# Altium PCB Fuel_Gauge.PcbDoc
Units mil, origin at the board's own origin, x right, y up, seen from the top; angles counter-clockwise.
Board outline 1400 x 1100 mil, 4 copper layers (Top Layer, Upper Inner Layer, Lower Inner Layer, Bottom Layer), stack 23.756 mil thick; 31 components, 17 nets, 111 pads, 69 vias.
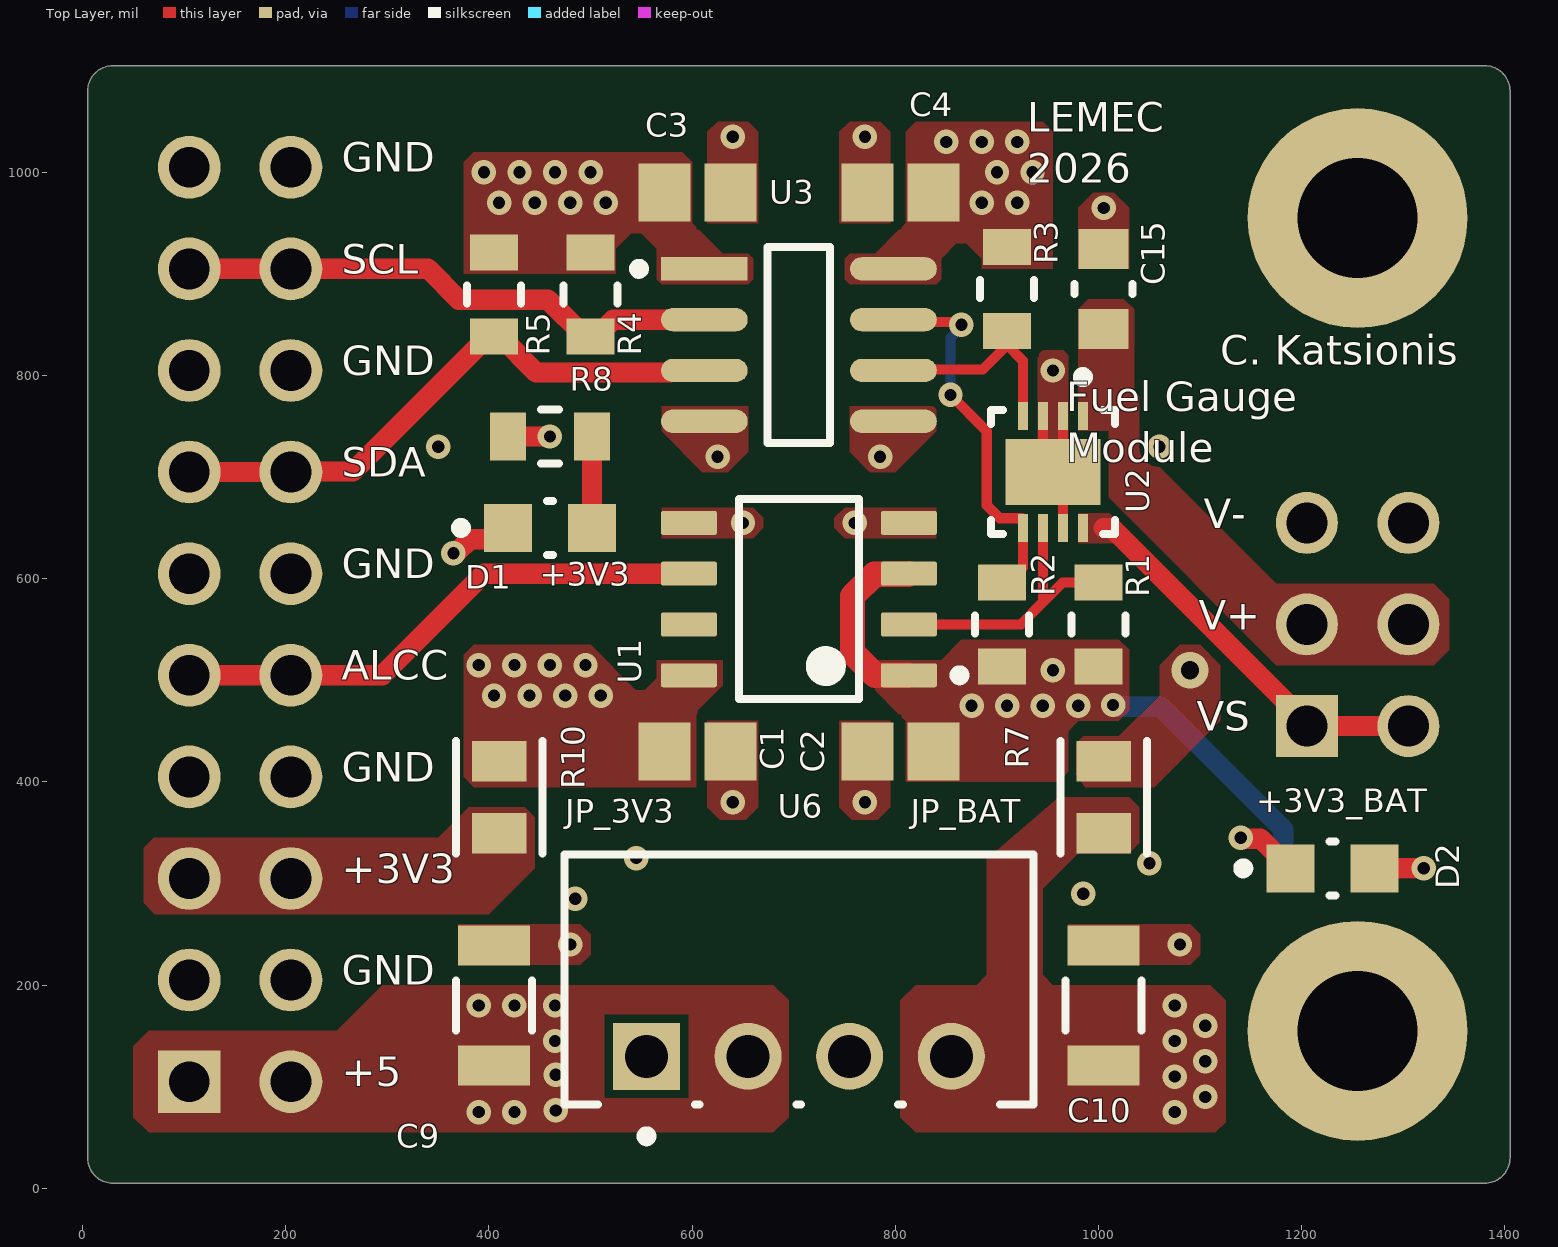
[diagram p0: Top Layer view]
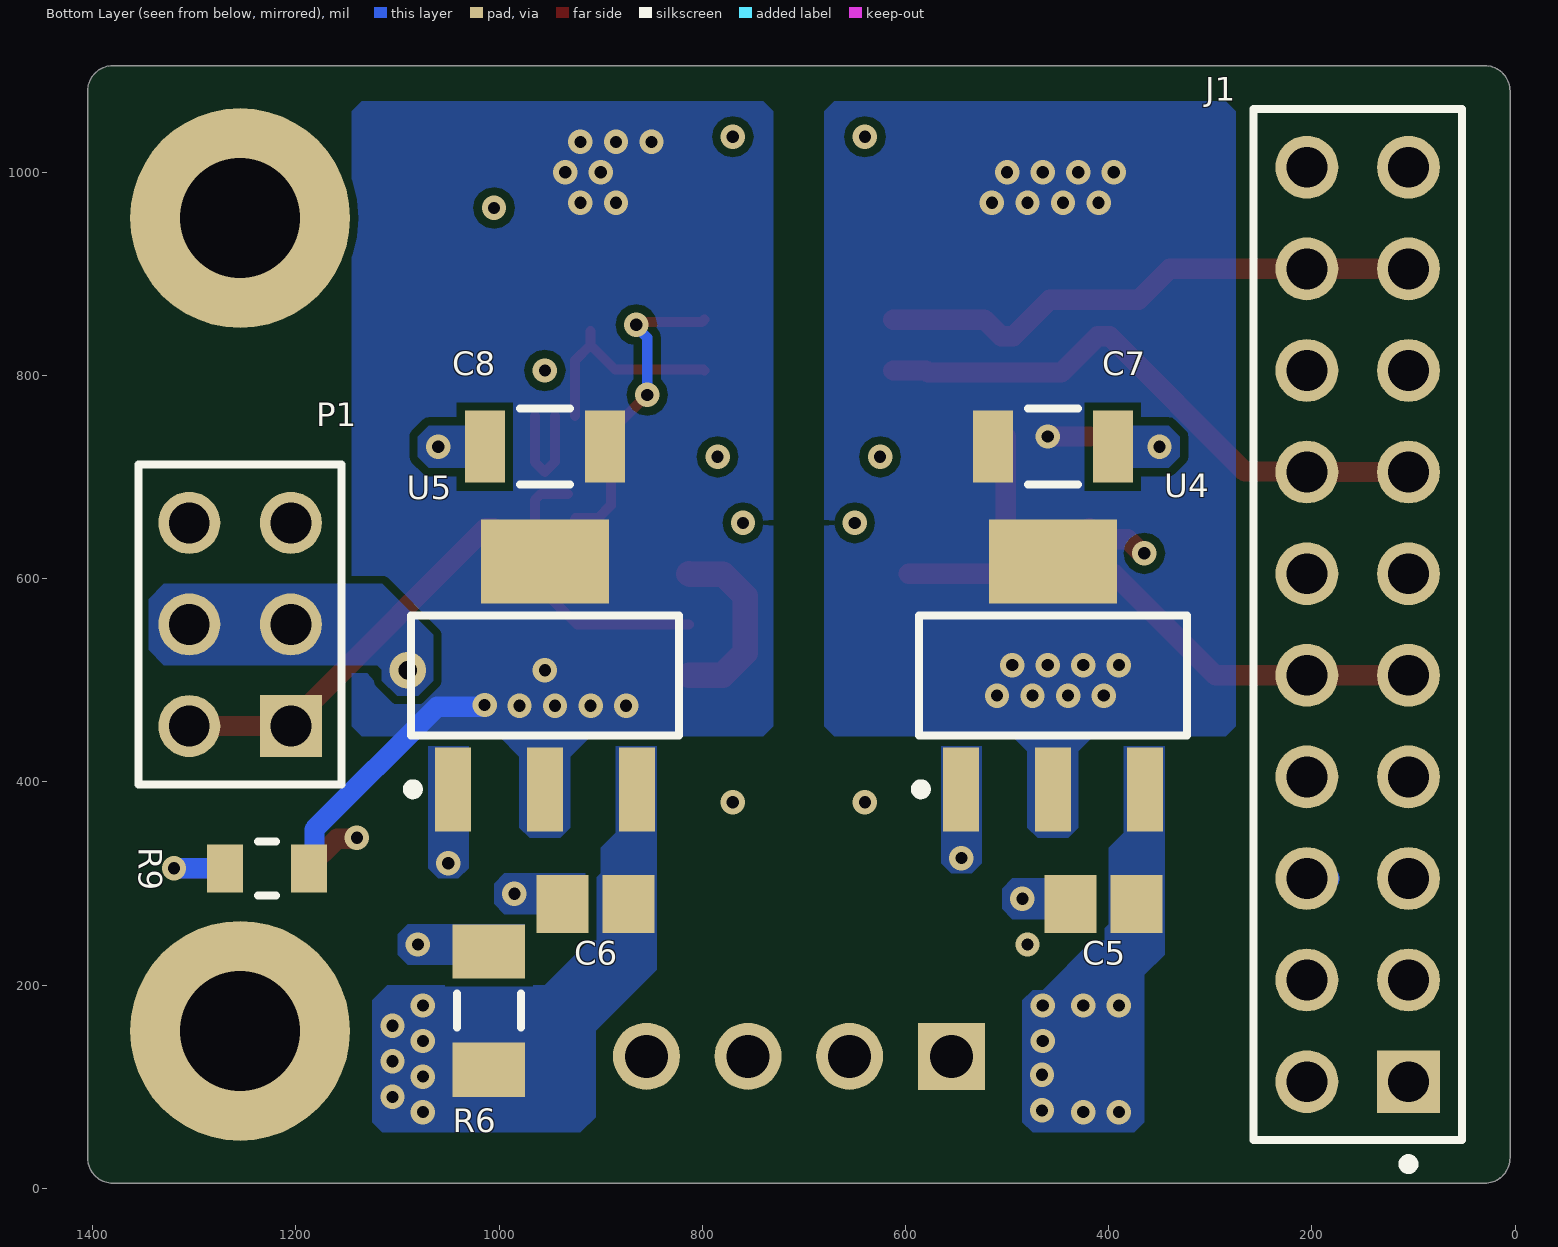
[diagram p1: Bottom Layer view, seen from below]
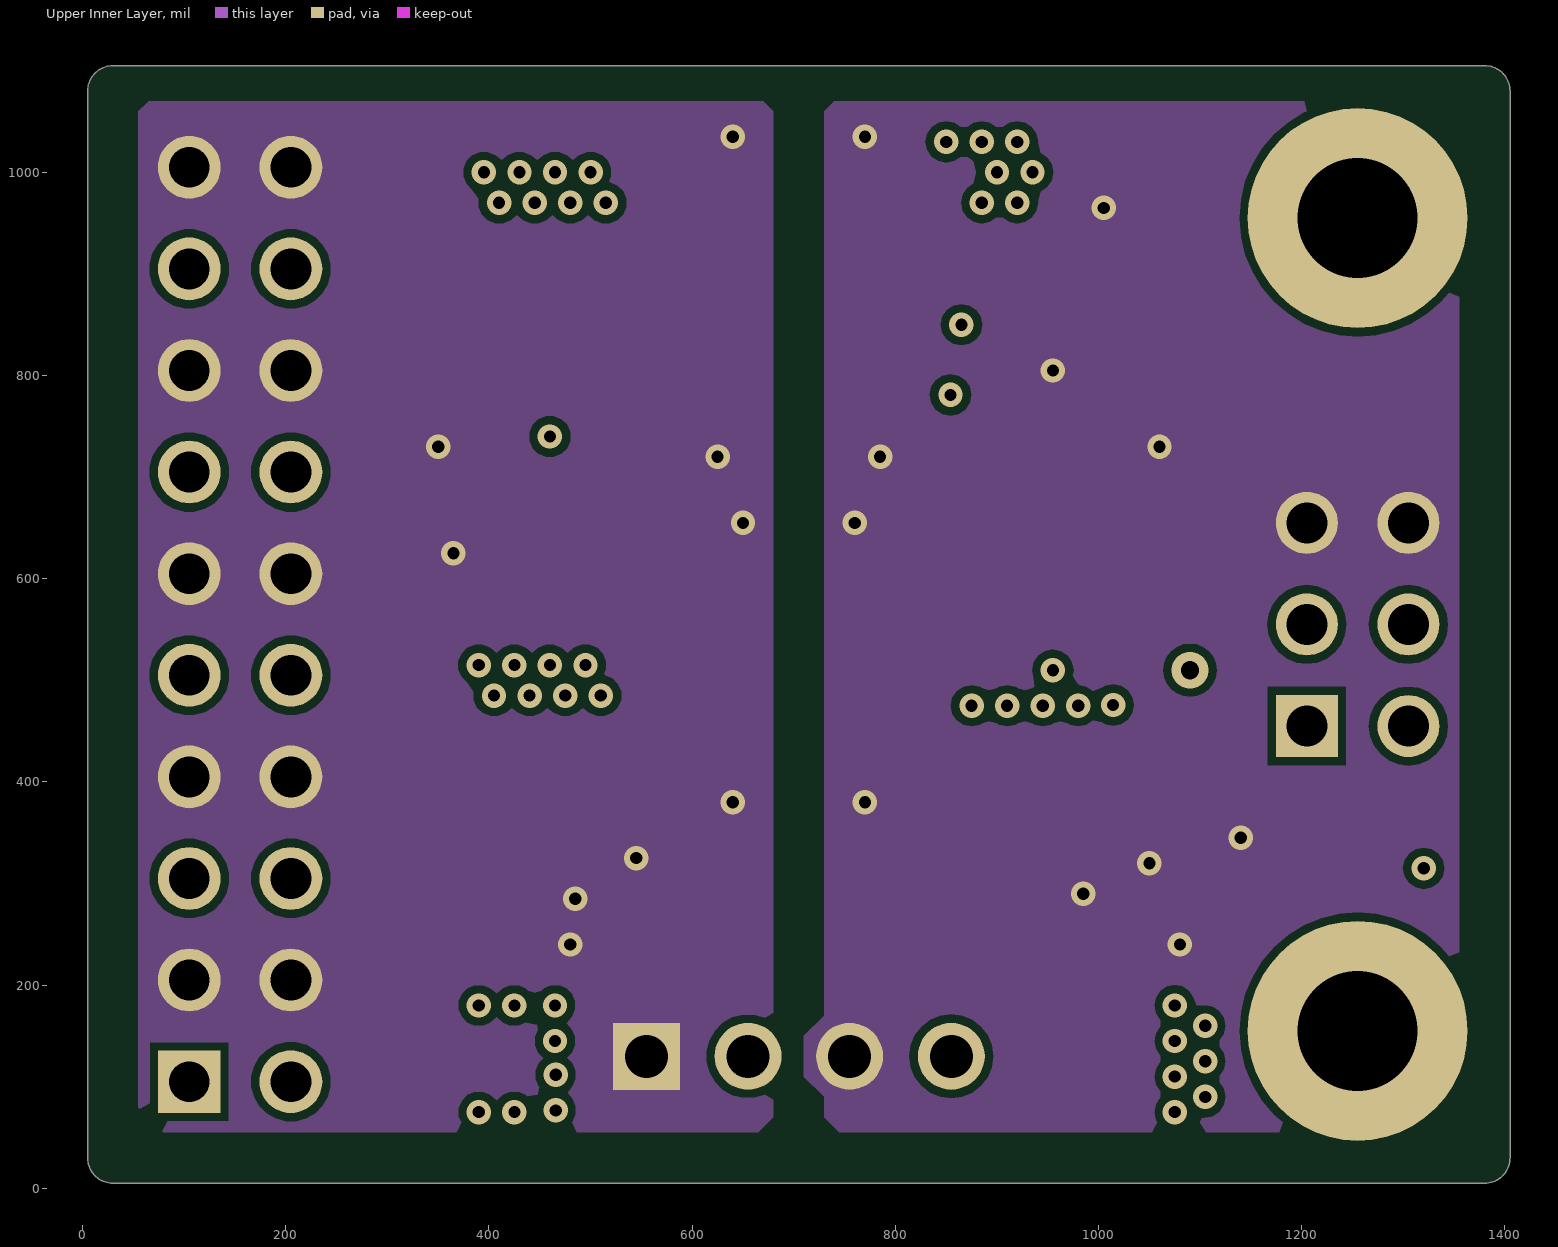
[diagram p2: Upper Inner Layer]
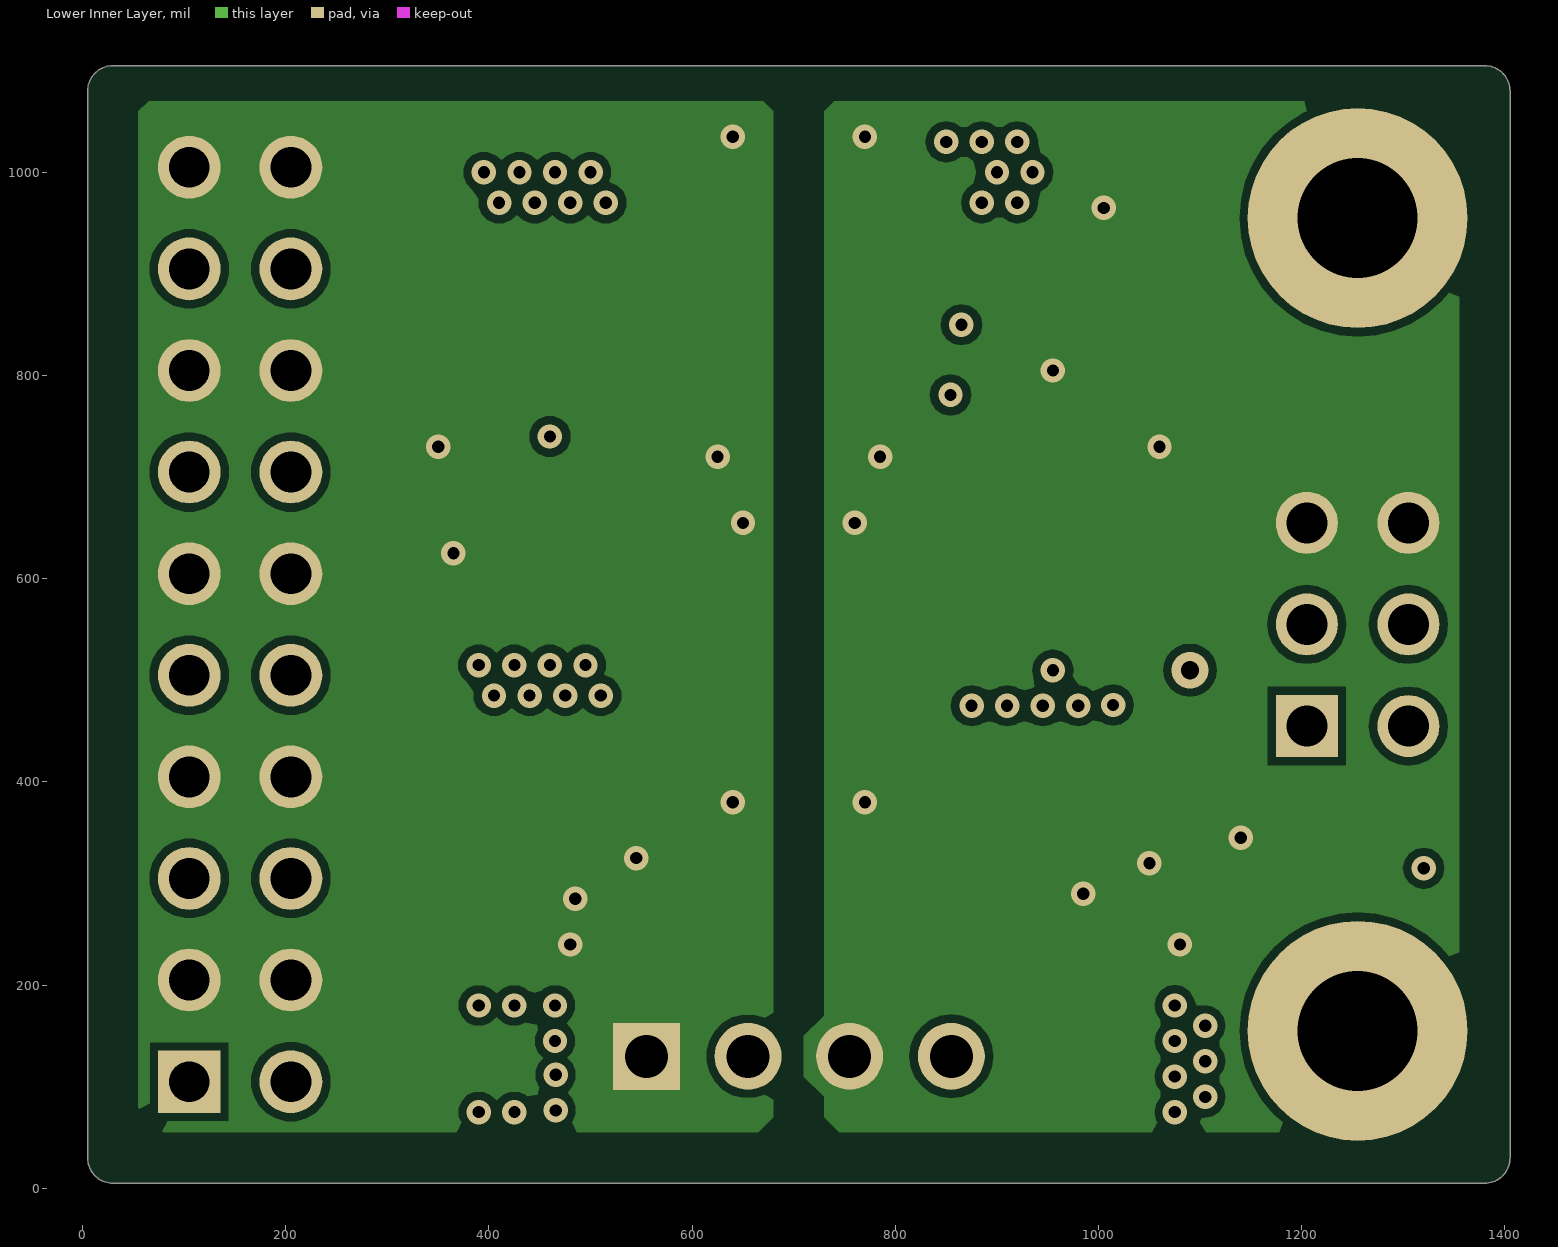
[diagram p3: Lower Inner Layer]
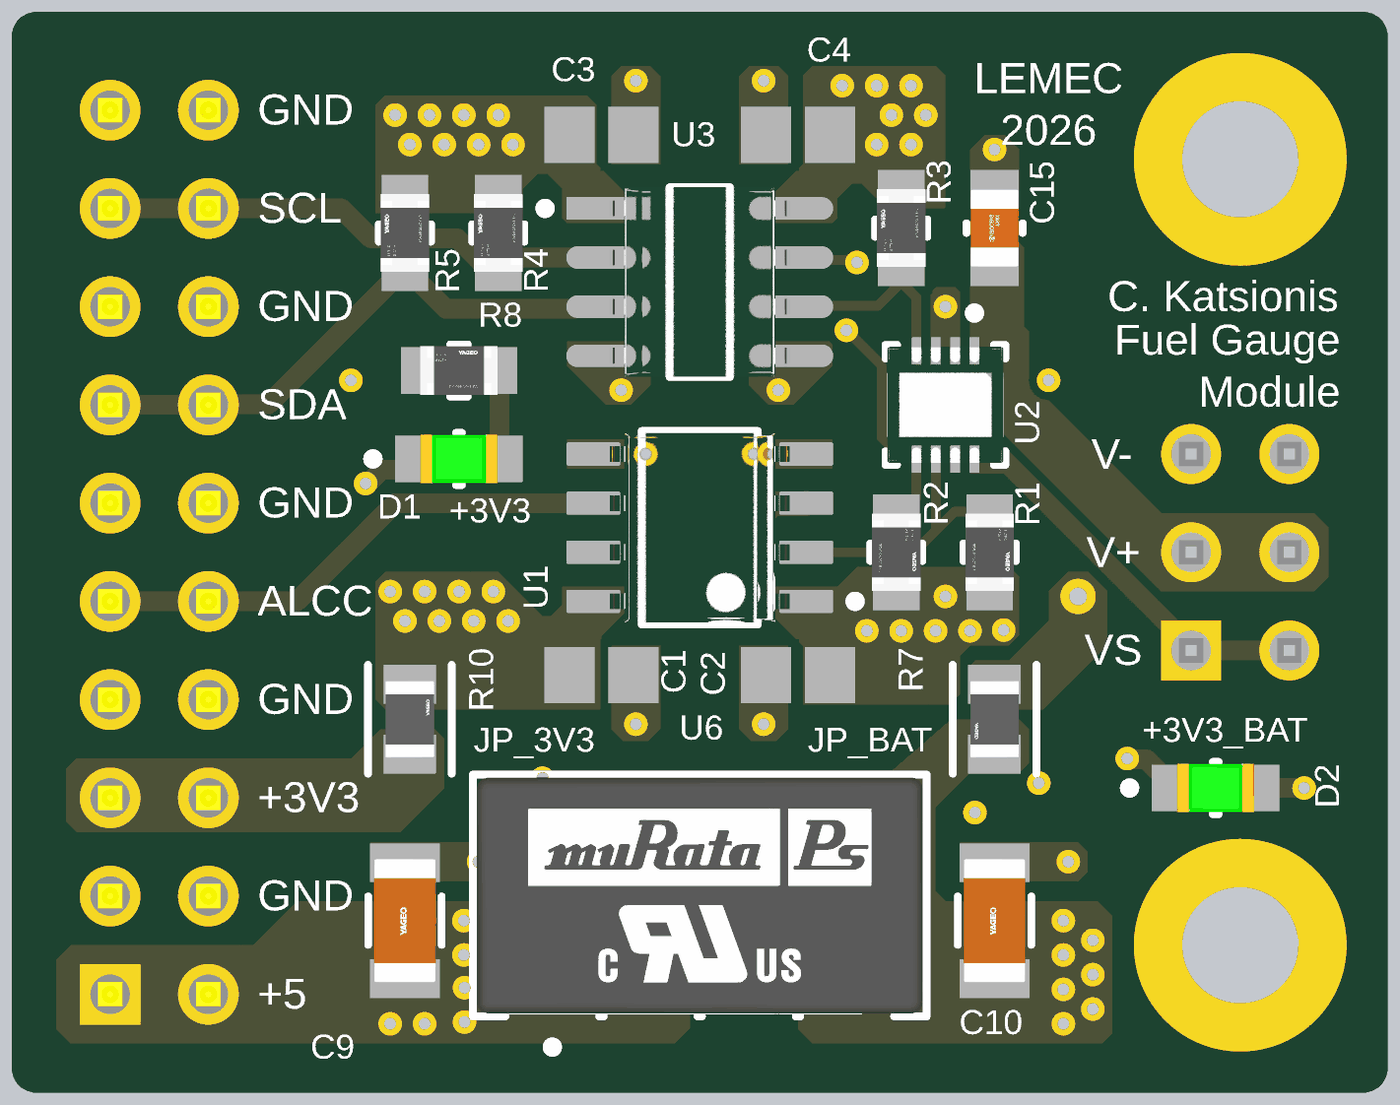
[diagram p4: 3D render of the assembled board from above, using the file's embedded part models]
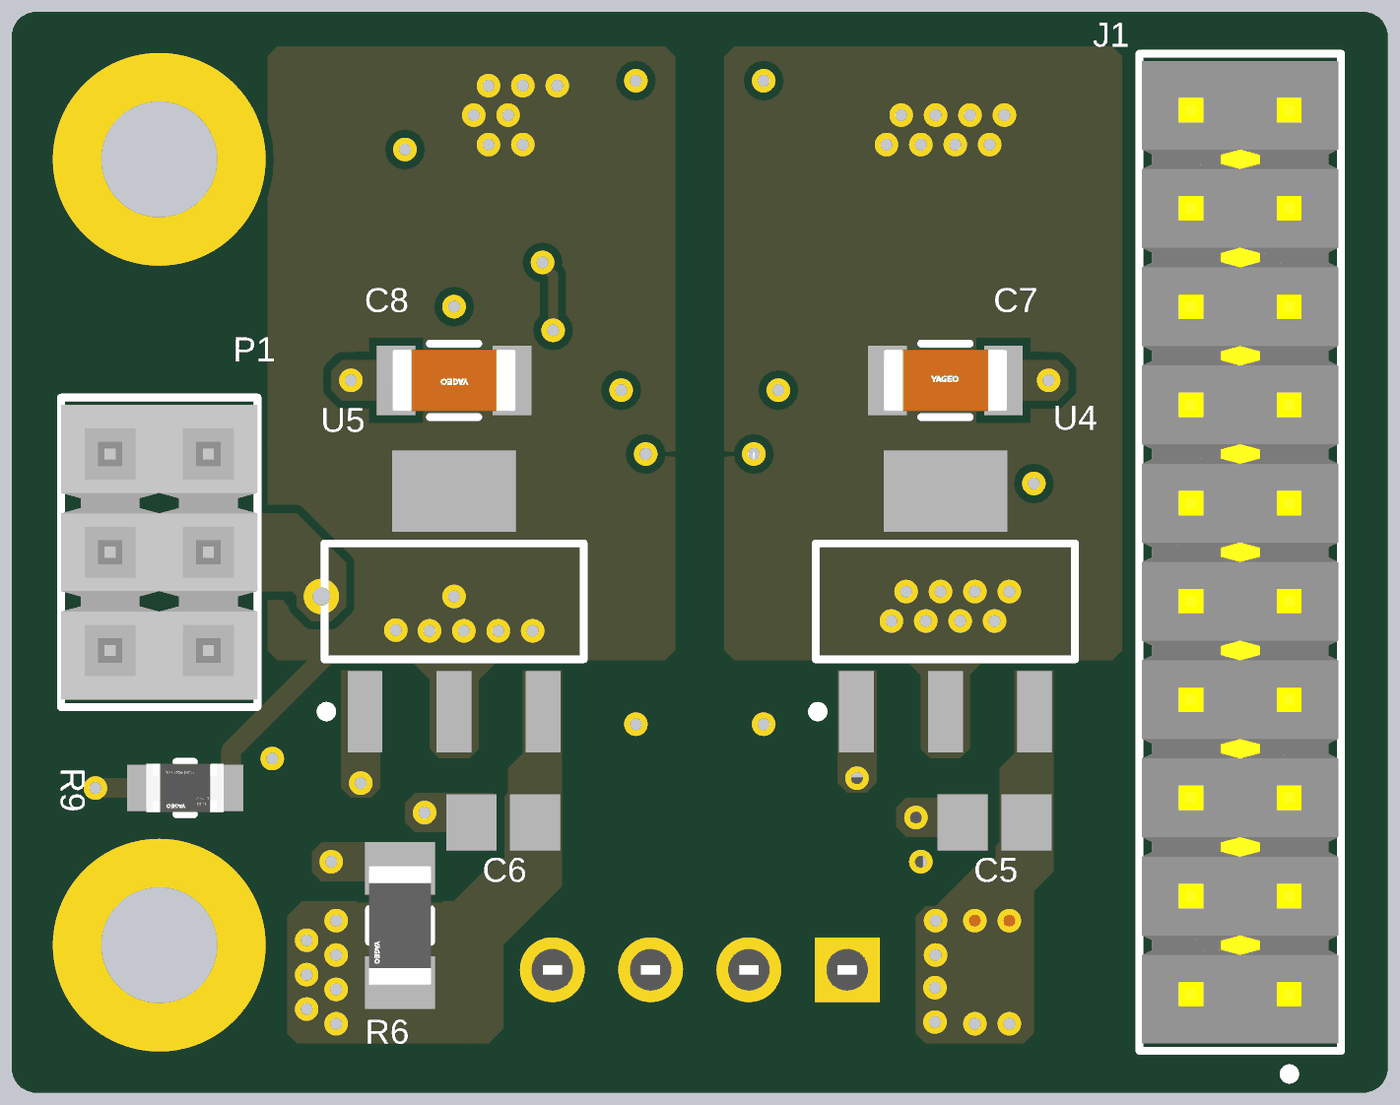
[diagram p5: 3D render of the assembled board from below, using the file's embedded part models]

## Layer stack, top to bottom
Top Solder: solder mask 0.4, Solder Resist, Dk 3.5
Top Layer: signal copper 1.4
Dielectric 2: prepreg 2.8, PP-006, Dk 4.1
Upper Inner Layer: signal copper 1.378
Dielectric 1: dielectric 12.6, FR-4, Dk 4.8
Lower Inner Layer: signal copper 1.378
Dielectric 3: prepreg 2.8, PP-006, Dk 4.1
Bottom Layer: signal copper 1.4
Bottom Solder: solder mask 0.4, Solder Resist, Dk 3.5

## Board outline
5,30 5,1080 cw(c30,1080) 30,1105 1380,1105 cw(c1380,1080) 1405,1080 1405,30 cw(c1380,30) 1380,5 30,5 cw(c30,30)

## Design rules (kind name [scope] priority, off if disabled: settings)
Clearance [All] p1: gap=8 ignorepadtopadclearanceinfootprint=FALSE
HoleSize [All] p1: absolutevalues=TRUE maxlimit=120 minlimit=1 maxpercent=80.000 minpercent=20.000
MinimumSolderMaskSliver [All] p1: minsoldermaskwidth=8
PolygonConnect [All] p1: connectstyle=Direct reliefconductorwidth=10 reliefentries=4 polygonreliefangle="90 Angle" airgapwidth=10
RoutingVias [All] p1: holewidth=12 width=24 viastyle="Through Hole" minholewidth=12 minwidth=24 maxholewidth=25 maxwidth=50
SilkToSolderMaskClearance [IsPad] p1: minsilkscreentomaskgap=7 clearancetoexposedcopper=TRUE
SolderMaskExpansion [All] p1: expansion=0 istentingtop=FALSE
SupplyNets "Schematic Supply Nets_2" [InNet('+3V3_EXT')] p1: voltage=0.000
SupplyNets "Schematic Supply Nets_9" [InNet('+3V3_BAT')] p2: voltage=0.000
SupplyNets "Schematic Supply Nets_6" [InNet('PWR_GND')] p3: voltage=0.000
SupplyNets "Schematic Supply Nets_5" [InNet('GND')] p4: voltage=0.000
SupplyNets "Schematic Supply Nets_4" [InNet('+5V')] p5: voltage=0.000
SupplyNets "Schematic Supply Nets_3" [InNet('+3V3')] p6: voltage=0.000
SupplyNets "Schematic Supply Nets_1" [InNet('+BAT_EXT')] p7: voltage=0.000
SupplyNets "Schematic Supply Nets" [InNet('+V_BAT_LDO')] p8: voltage=0.000
Width PowerWidth [InNetClass('Power')] p1: maxlimit=25 minlimit=10 preferedwidth=20 minimp=50.000000 maximp=50.000000 favimp=50.000000
Width [InNetClass('All Nets')] p2: maxlimit=20 minlimit=10 preferedwidth=15 minimp=50.000000 maximp=50.000000 favimp=50.000000
27 further rules are at their usual default settings.

## Classes and differential pairs
net class Power: +3V3 +3V3_BAT +3V3_EXT +5V +BAT_EXT +V_BAT_LDO GND PWR_GND
component class Fuel_Gauge: C1 C2 C3 C4 C5 C6 C7 C8 C9 C10 C15 R1 R2 R3 R4 R5 R6 U1 U2 U3 U4 U5 U6
component class Connectors: D1 D2 J1 P1 R7 R8 R9 R10

## Components (designator, comment, footprint, x,y, rotation, side; value= is the part's Value field where it differs from the comment)
C1 "0.1u" CAPC2013X145X48NL20T23 605,430 r180 top
C2 "0.1u" CAPC2013X145X48NL20T23 805,430 r0 top
C3 "0.1u" CAPC2013X145X48NL20T23 605,980 r180 top
C4 "0.1u" CAPC2013X145X48NL20T23 805,980 r0 top
C5 "0.1u" CAPC2013X145X48NL20T23 405,280 r180 bottom
C6 "0.1u" CAPC2013X145X48NL20T23 905,280 r180 bottom
C7 "10u" FP-CC1206-FD-MFG 455,730 r180 bottom
C8 "10u" FP-CC1206-FD-MFG 955,730 r0 bottom
C9 "10u" FP-CC1206-FD-MFG 405,180 r90 top
C10 "10u" FP-CC1206-FD-MFG 1005,180 r90 top
C15 "08051C105K4T2A" FP-0805-L_2_01_0_2-W_1_25-MFG 1005,885 r90 top
D1 "+3V3" FP-LTST-C170GKT-MFG 460,650 r0 top
D2 "+3V3_ISO" FP-LTST-C170GKT-MFG 1230,315 r0 top
J1 "MCU_CONNECTOR" FP-TSW-110-26-G-D-MFG 155,555 r90 bottom
P1 "BAT_CONNECTOR" SMTC-TSW-103-08-X-D 1205,455 r90 bottom
R1 "4K7" FP-RT0805-MFG 1000,555 r270 top value=4.7KΩ
R2 "4K7" FP-RT0805-MFG 905,555 r270 top value=4.7KΩ
R3 "4K7" FP-RT0805-MFG 910,885 r90 top value=4.7KΩ
R4 "4K7" FP-RT0805-MFG 500,880 r90 top value=4.7KΩ
R5 "4K7" FP-RT0805-MFG 405,880 r90 top value=4.7KΩ
R6 "270R" FP-AF1206-IPC_A 1010,175 r270 bottom
R7 "0R" FP-AF0805-IPC_B 1005,385 r270 top
R8 "220R" FP-RT0805-MFG 460,740 r0 top value=220Ω
R9 "220R" FP-RT0805-MFG 1228.66,315 r0 bottom value=220Ω
R10 "0R" FP-AF0805-IPC_B 410,385 r90 top
U1 "ISO7710FDR" FP-D0008B-MFG 705,580 r180 top
U2 "LTC2944IDD#PBF" FP-DD-8-05-08-1698-MFG 955,705 r270 top
U3 "ISO1541QDRQ1" FP-D0008A-IPC_B 705,830 r0 top
U4 "LD1117S33TR" SOT-223_L 455,505 r90 bottom
U5 "LD1117S33TR" SOT-223_L 955,505 r90 bottom
U6 "NKE0505SC" FP-NKE-SIP-MFG 705,205.59 r0 top

## Footprints (in the part's own frame and the unit in brackets; to place one, negate y for a bottom-side part, rotate by r counter-clockwise, add the part's x,y. Pads: shape width x height; smd on the part's side, far side on the other; paste and mask are expansions set on the pad)
CAPC2013X145X48NL20T23 [mm] "Chip Capacitor, 2-Leads, Body 2.00x1.25mm, IPC Medium Density"
  rect 1.3x1.45 smd: 1(-0.825,0) 2(0.825,0)
  body extent -1.1,-0.72 1.1,0.72, height 1.45
FP-0805-L_2_01_0_2-W_1_25-MFG [mm]
  rect 1x1.25 smd paste+0 mask+0: 1(-1,0) 2(1,0)
  silkscreen extent -0.13,-0.72 0.13,0.72, body extent -1,-0.63 1,0.63, height 1.4
FP-AF0805-IPC_B [mil]
  rect 39.69x53.63 smd paste+0 mask+0: 1(-35.51,0) 2(35.51,0)
  silkscreen extent -55,-43 55,43, body extent -39,-25 39,25, height 24
FP-AF1206-IPC_A [mil]
  rect 53.47x71.34 smd paste+0 mask+0: 1(-58.15,0) 2(58.15,0)
  silkscreen extent -17,-31 17,31, body extent -61,-31 61,31, height 26
FP-CC1206-FD-MFG [mm]
  rect 1x1.8 smd paste+0 mask+0: 1(-1.5,0) 2(1.5,0)
  silkscreen extent -0.63,-0.95 0.63,0.95, body extent -1.6,-0.8 1.6,0.8, height 1.9
FP-D0008A-IPC_B [mil]
  rect 85.4x22.92 smd paste+0 mask+0: 1(-93.06,75)
  rrect100% 85.4x22.92 smd paste+0 mask+0: 2(-93.06,25) 3(-93.06,-25) 4(-93.06,-75) 5(93.06,-75) 6(93.06,-25) 7(93.06,25) 8(93.06,75)
  silkscreen extent -162,-97 31,97, body extent -146,-106 146,106, height 10
FP-D0008B-MFG [mm]
  rrect17% 1.4x0.6 smd paste+0 mask+0: 1(-2.75,1.905) 2(-2.75,0.635) 3(-2.75,-0.635) 4(-2.75,-1.905) 5(2.75,-1.905) 6(2.75,-0.635) 7(2.75,0.635) 8(2.75,1.905)
  silkscreen extent -4.14,-2.5 1.5,2.5, body extent -3.55,-2.75 3.55,2.75, height 0.25
FP-DD-8-05-08-1698-MFG [mm]
  rect 0.7x0.25 smd paste+0 mask+0: 1(-1.4,0.75) 2(-1.4,0.25) 3(-1.4,-0.25) 4(-1.4,-0.75) 5(1.4,-0.75) 6(1.4,-0.25) 7(1.4,0.25) 8(1.4,0.75)
  rect 1.65x2.38 smd paste+0 mask+0: 9(0,0)
  silkscreen extent -2.5,-1.55 1.55,1.55, body extent -1.85,-1.65 1.85,1.65, height 0.25
FP-LTST-C170GKT-MFG [mm]
  rect 1.2x1.2 smd paste+0 mask+0: 1(-1.05,0) 2(1.05,0)
  silkscreen extent -2.35,-0.67 0.08,0.67, body extent -1.75,-0.77 1.75,0.77, height 0.25
FP-NKE-SIP-MFG [mm]
  rect 1.675x1.675 hole 1.075 paste-2539.97 mask+0: 1(-3.81,-1.92)
  round 1.675 hole 1.075 paste-2539.97 mask+0: 2(-1.27,-1.92) 3(1.27,-1.92) 4(3.81,-1.92)
  silkscreen extent -5.86,-4.04 5.86,3.13, body extent -5.96,-3.22 5.96,3.22, height 0.25
FP-RT0805-MFG [mm]
  rect 0.9x1.2 smd paste+0 mask+0: 1(-1.05,0) 2(1.05,0)
  silkscreen extent -0.23,-0.67 0.23,0.67, body extent -1,-0.63 1,0.63, height 0.6
FP-TSW-110-26-G-D-MFG [mm]
  rect 1.57x1.57 hole 1.02 paste-2539.97 mask+0: 1(-11.43,-1.27)
  round 1.57 hole 1.02 paste-2539.97 mask+0: 2(-11.43,1.27) 3(-8.89,-1.27) 4(-8.89,1.27) 5(-6.35,-1.27) 6(-6.35,1.27) 7(-3.81,-1.27) 8(-3.81,1.27) 9(-1.27,-1.27) 10(-1.27,1.27) 11(1.27,-1.27) 12(1.27,1.27) 13(3.81,-1.27) 14(3.81,1.27) 15(6.35,-1.27) 16(6.35,1.27) 17(8.89,-1.27) 18(8.89,1.27) 19(11.43,-1.27) 20(11.43,1.27)
  silkscreen extent -13.61,-2.61 12.89,2.61, body extent -12.7,-2.54 12.7,2.54, height 8.71
SMTC-TSW-103-08-X-D [mm] ".025 SQ Post Terminal Strip Assembly, 2x3 Pins, Vertical, 2.54mm Pitch, Male"
  rect 1.55x1.55 hole 1.02: 1(0,0)
  round 1.55 hole 1.02: 2(0,2.54) 3(2.54,0) 4(2.54,2.54) 5(5.08,0) 6(5.08,2.54)
  silkscreen extent -1.46,-1.27 6.54,3.81, body extent -1.27,-1.27 6.35,3.81, height 8.38
SOT-223_L [mm] "SOT223, 4-Leads, Body 6.5x3.5mm, Pitch 2.3mm, Lead Span 7mm, IPC High Density"
  rect 2.1x0.9 smd: 1(-2.85,2.3) 2(-2.85,0) 3(-2.85,-2.3)
  rect 2.1x3.2 smd: 4(2.85,0)
  silkscreen extent -2.97,-3.35 1.5,3.43, body extent -1.85,-3.35 1.85,3.35, height 1.8

## Part data
C1 C2 C3 C4 C5 C6: library part CMP-2007-01705-1, Manufacturer=Vitramon, Part Number=VJ0805Y104KXAMR
C7 C8 C9 C10: library part CMP-03422-001420-1, "CAP CER 10UF 50V X5R 1206", Capacitance=10uF, Case/Package=1206, Dielectric=X5R, Max Operating Temperature=85°C, Min Operating Temperature=-55°C, Tolerance=10%, Voltage Rating=50V, Halogen Free="Halogen Free", Lead Free="Lead Free", Length=0.126inch, Mount="Surface Mount", Packaging="Tape and Reel", RoHS Compliant=Yes, Thickness=0.075inch, Voltage Rating (DC)=50V, Width=0.063inch
C15: library part CMP-07738-122049624-1, "08051C105K4T2A Cap Ceramic 1uF 100V X7R 10% Pad SMD 0805 125C Automotive T/R", Capacitance=1µF, Case/Package=0805, Dielectric=X7R, Max Operating Temperature=125°C, Min Operating Temperature=-55°C, Tolerance=10%, Voltage Rating=100V, Height=1.4mm, Lifecycle Status=Production, Material=Ceramic, NexarPartId=122049624, RoHS=Compliant, Schedule B=8532240020, Voltage Rating (DC)=100V
D1 D2: library part CMP-1674-00002-6, "LED GREEN CLEAR SMD", Case Code (Imperial)=0805, Case Code (Metric)=2012, Color=Green, Forward Current=30mA, Forward Voltage=2.1V, Lens Color=Colorless, Max Operating Temperature=85°C, Min Operating Temperature=-55°C, Package Quantity=1, Power Dissipation=100mW, Reverse Voltage=5V, Test Current=10mA, Case/Package=0805, Depth=1.25mm, Dominant Wavelength=569nm, Height=1.1mm, Illumination Color=Green, Lead Free="Lead Free", Length=2mm, Lens Style=Diffused, Lens Transparency=Clear, Luminous Intensity=6mcd, Mount="Surface Mount", Number of Elements=1, Number of LEDs=1, Number of Pins=2, Packaging="Tape and Reel", Power Rating=100mW, Radiation Hardening=No, Viewing Angle=130°, Voltage=5V, Wavelength=565nm, Width=1.25mm
J1: library part CMP-02766-000032-1, "CONN HEADER VERT 20POS 2.54MM", Manufacturer=Samtec, Manufacturer Part Number=TSW-110-26-G-D, Temperature="-55°C to +125°C", Temperature Range High=+125°C, Temperature Range Low=-55°C, Automotive=No, Category=Conn, ComponentLink2Description=Datasheet, ComponentLink2URL=http://suddendocs.samtec.com/prints/tsw-xxx-xx-xxx-x-xx-xxx-mkt.pdf, Conn Gender=Male, Conn Orientation=Vertical, Contact Material=Gold,Nickel, Device Class L1=Connectors, Device Class L2="Headers and Wire Housings", Device Class L3=unset, Digikey Description="CONN HEADER VERT 20POS 2.54MM", Footprint Url=http://suddendocs.samtec.com/prints/tsw-xxx-xx-x-x-xx-xxx-footprint.pdf, Height=8.71mm, Lead Free=Yes, Number of Contacts=20, Number of Rows=2, Octopart=https://octopart.com/tsw-110-26-g-d-samtec-274552, Package=TSW-110-26-G-D, Pitch=2.54mm, RoHS=TRUE
P1: library part CMP-1024-00338-1, "0.025\" SQ Post Header, Through-hole, Vertical, -55 to 125 degC, 2.54 mm Pitch, 6-Pin, Male, RoHS", Manufacturer=Samtec, PartNumber=TSW-103-08-G-D, Temperature Range="-55 to 125 degC", ComponentLink1Description="Manufacturer URL", ComponentLink1URL=http://www.samtec.com, ComponentLink2Description=Datasheet, ComponentLink2URL=http://www.samtec.com/documents/webfiles/pdf/TSW_TH.PDF, ComponentLink3Description="Package Specification", ComponentLink3URL=http://www.samtec.com/documents/webfiles/cpdf/TSW-XXX-XX-XXX-X-XX-XXX-MKT.pdf, DatasheetVersion=F-214, Mounting Technology=Through-hole, Orientation=Vertical, PackageDescription=".025[0.64] SQ. Post Terminal Strip Assembly", PackageReference=TSW-103-08-X-D, PackageVersion="DM, 8/1988", Pitch="2.54 mm", RoHS=True
R1 R2 R3 R4 R5: library part CMP-03412-025396-1, "RT0805 4.7KΩ 0.125W 50 ppm/°C 0.01%", Manufacturer=Yageo, Manufacturer Part Number=RT0805FRE134K7L, Package=RT0805, Power Rating=0.125W, Resistance=4.7KΩ, Temperature="-55°C to +155°C", Temperature Coefficient="50 ppm/°C", Temperature Range High=+155°C, Temperature Range Low=-55°C, Tolerance=0.0001, Voltage Rating=150V, Automotive=No, Category=Res, ComponentLink2Description=Datasheet, ComponentLink2URL=http://www.yageo.com/documents/recent/PYu-RT_1-to-0.01_RoHS_L_9.pdf, Composition="Thin Film", Device Class L1="Passive Components", Device Class L2=Resistors, Device Class L3="Chip SMD Resistors", Footprint Url=http://www.yageo.com/exep/pages/download/literatures/PYu-R_Mount_10.pdf, Height=0.6mm, Ipc Land Pattern Name=RESC200125X50, Lead Free=Yes, Octopart=https://octopart.com/rt0805fre134k7l-yageo-16262042, RoHS=TRUE, Series=RT
R6: library part CMP-03412-047403-1, "Anti-Sulfurated Chip Resistor Automotive Grade 270Ω 5% 0.25W ±100ppm/°C 1206"
R7 R10: library part CMP-03412-047152-1, "Anti-Sulfurated Chip Resistor Automotive Grade 0Ω Jumper 0.125W 0805", Case Code (Imperial)=0805, Case Code (Metric)=2012, Max Operating Temperature=155°C, Max Power Dissipation=125mW, Min Operating Temperature=-55°C, Package Quantity=5000, Resistor Type="Thick Film", Case/Package=0805, Features="Moisture Resistant", Height=0.024inch, Length=0.079inch, Number of Terminations=2, Packaging="Tape and Reel", Resistance=0R, RoHS Compliant=Yes, Series=AF, Termination=SMD/SMT, Weight=0.000194oz, Width=1.25mm
R8 R9: library part CMP-03412-035594-1, "RES SMD 220 OHM 1% 1/8W 0805", Manufacturer=Yageo, Manufacturer Part Number=RT0805FRE07220RL, Package=RT0805, Power Rating=0.125W, Resistance=220Ω, Temperature="-55°C to +155°C", Temperature Coefficient="50 ppm/°C", Temperature Range High=+155°C, Temperature Range Low=-55°C, Tolerance=0.0001, Voltage Rating=150V, Automotive=No, Category=Res, ComponentLink2Description=Datasheet, ComponentLink2URL=http://www.yageo.com/documents/recent/PYu-RT_1-to-0.01_RoHS_L_9.pdf, Composition="Thin Film", Device Class L1="Passive Components", Device Class L2=Resistors, Device Class L3="Chip SMD Resistors", Digikey Description="RES SMD 220 OHM 1% 1/8W 0805", Footprint Url=http://www.yageo.com/exep/pages/download/literatures/PYu-R_Mount_10.pdf, Height=0.6mm, Ipc Land Pattern Name=RESC200125X50, Lead Free=Yes, Mouser Description="Res Thin Film 0805 220 Ohm 1% 1/8W ±50ppm/°C SMD Paper T/R", Octopart=https://octopart.com/rt0805fre07220rl-yageo-39797223, RoHS=TRUE, Series=RT
U1: library part CMP-04872-000020-1, "DGTL ISO 3000VRMS 1CH GP 8SOIC", Max Operating Temperature=125°C, Min Operating Temperature=-55°C, Number of Channels=1
U2: library part CMP-09132-000003-1, "IC BATTERY GAS GAUGE I2C 8DFN", Ambient Temperature Range High=+85°C, Ambient Temperature Range Low=-40°C, Manufacturer="Analog Devices", Max Supply Voltage=60V, Min Supply Voltage=3.6V, Nominal Supply Current=15-850uA, Package=DD-8-05-08-1698, Temperature="-40°C to +85°C", Automotive=No, Category=IC, ComponentLink2Description=Datasheet, ComponentLink2URL=https://www.analog.com/media/en/technical-documentation/data-sheets/2944fa.pdf, Device Class L1="Integrated Circuits (ICs)", Device Class L2="Power Management ICs", Device Class L3="Battery Management", Digikey Description="IC BATTERY GAS GAUGE I2C 8DFN", Height=0.8mm, Ipc Land Pattern Name=DFN300X300X75-8, Lead Free=Yes, Manufacturer Part Number=LTC2944IDD#PBF, Mouser Description="LTC2944 - 60V Battery Gas Gauge with Temperature, Voltage and Current Measurement", Number Of Cells=1, Number Of Outputs=1, Octopart=https://octopart.com/ltc2944idd%23pbf-analog+devices-88318751, RoHS=TRUE, Standoff Height=0mm, Temperature Range High=+85°C, Temperature Range Low=-40°C
U3: library part CMP-04872-000096-1, "AUTO ISO I2C 2500VRMS 2CH 8SOIC", Case/Package=SOIC, Isolated Power=No, Max Operating Temperature=125°C, Min Operating Temperature=-40°C, Working Voltage=560V, Channel Type=Bidirectional, Data Rate=1Mbps, Mount="Surface Mount", Number of Channels=2, Number of Pins=8, Packaging="Cut Tape", Pulse Width Distortion (PWD)=21ns, RoHS Compliant=Yes
U4 U5: library part CMP-0244-00310-1, "Fixed Low Drop Positive Voltage Regulator, 3.3V, 4-Pin SOT-223, Tape and Reel", ComponentLink1Description="Manufacturer URL", ComponentLink1URL=http://www.st.com, ComponentLink2Description=Datasheet, ComponentLink2URL=http://www.st.com/internet/com/TECHNICAL_RESOURCES/TECHNICAL_LITERATURE/DATASHEET/CD00000544.pdf, DatasheetVersion=1/11/2011, PackageDescription="4-Pin SOT-223 Package, 6.5 x 3.5 mm Body, 2.3 mm Pitch, 7 mm Lead Span", PackageReference=SOT-223, PackageVersion=2010
U6: library part CMP-20596-000001-1, "DC DC CONVERTER 12V 1W", Manufacturer="Murata Power Solutions Inc", Manufacturer Part Number=NKE1212SC, Max Power Dissipation=1W, Max Supply Voltage=13.2V, Min Supply Voltage=10.8V, Nominal Supply Current=105mA, Output Current=83mA, Output Voltage=12V, Package=NKE-SIP, Switching Frequency=115kHz, Temperature="-40°C to +85°C", Temperature Range High=+85°C, Temperature Range Low=-40°C, Automotive=No, Category=IC, ComponentLink2Description=Datasheet, ComponentLink2URL=https://power.murata.com/pub/data/power/ncl/kdc_nke.pdf, Device Class L1="Integrated Circuits (ICs)", Device Class L2="Power Management ICs", Device Class L3="Voltage Regulators - Switching", Digikey Description="DC DC CONVERTER 12V 1W", Height=7.71mm, Lead Free=Yes, Mouser Description="Isolated DC/DC Converters 1W SNGL OUT 12-12V Single Output", Number Of Outputs=1, Octopart=https://octopart.com/nke1212sc-murata+power+solutions-49448374, Output Type=Fixed, RoHS=TRUE, Standoff Height=0.4mm, Switching Topology=Boost

## Free pads (board coordinates)
  round 216.54 hole 118.11: 2(1255,155) 2(1255,955)

## Via types
v1: diameter 24, hole 12, Top Layer to Bottom Layer, 68 vias
v2: diameter 36, hole 18, Top Layer to Bottom Layer, 1 vias

## Nets (pads, with @x,y where several pads share a name; then routed paths per layer and width w, separated by ;. In a path a pad name is that pad's centre, name@x,y a point inside that pad or via, vN(x,y) a via of type N, cw(c..) or ccw(c..) an arc to the next point about the centre after c; other vN are vias at no path point)
+3V3: C1.2 C3.2 C7.1 R4.2 R5.2 R8.1 R10.2 U1.8 U3.1 U4.2 U4.4 | length 41.3
  Top Layer w20: R8.1 v1(460,740)
  other v1: 405,485 440,485 475,485 510,485 390,515 425,515 460,515 495,515 410,970 445,970 480,970 515,970 395,1000 430,1000 465,1000 500,1000
+3V3_BAT: C2.2 C4.2 C8.1 R1.2 R2.2 R3.2 R9.1 U1.1 U1.3 U3.8 U5.2 U5.4 | length 443.7
  Top Layer w25: U1.1 780,505 757.85,527.15 757.85,582.85 779.31,604.31 812.58,604.31 U1.3
  Bottom Layer w20: v1(1014.26,475.74) 1015.99,474.01 1060.99,474.01 1181.78,353.22 1181.78,320.54 R9.1
  other v1: 875,475 910,475 945,475 980,475 955,510 885,970 920,970 900,1000 935,1000 850,1030 885,1030 920,1030
+3V3_EXT: J1.5 J1.6 R10.1 | length 29.4
  Bottom Layer w25: J1.6@185.57,305 J1.6 J1.6@212.04,312.04
+5V: C5.2 C9.1 J1.1 J1.2 U4.3 U6.2
  other v1: 390,75 425,75 465.63,76.75 465.63,111.75 465,145 390,180 425,180 465,180
+BAT_EXT: C15.1 P1.3 P1.4 R7.1 U2.1
  other v2: 1090,510
+V_BAT_LDO: C6.2 C10.1 R6.2 R7.2 U5.3 U6.4 | length 11.1
  Top Layer w25: U6.4 U6.4@866.08,130
  other v1: 1075,75 1105,90 1075,110 1105,125 1075,145 1105,160 1075,180
GND: C1.1 C3.1 C5.1 C7.2 C9.2 D1.1 J1.3 J1.4 J1.7 J1.8 J1.11 J1.12 J1.15 J1.16 J1.19 J1.20 U1.5 U3.4 U4.1 U6.1 | length 64
  Top Layer w20: v1(365,625) 367.44,625 381.33,638.89 407.55,638.89 D1.1
  other v1: 480,240 485,285 545,325 640,380 650,655 625,720 350,730 640,1035
NetD1_2: D1.2 R8.2 | length 90
  Top Layer w20: D1.2 R8.2
NetD2_2: D2.2 R9.2 | length 98.7
  Top Layer w20: D2.2 v1(1320,315)
  Bottom Layer w20: R9.2 v1(1320,315)
NetJ1_9: J1.9 J1.10 U1.6 | length 533.2
  Top Layer w20: J1.9 J1.10 295,505 395,605 U1.6
NetJ1_13: J1.13 J1.14 R5.1 U3.3 | length 578
  Top Layer w20: J1.13 J1.14 205.47,705.47 265.91,705.47 399.09,838.66 R5.1 410.91,838.66 446.62,802.94 577.86,802.94 579.91,805 U3.3
NetJ1_17: J1.17 J1.18 R4.1 U3.2 | length 541.2
  Top Layer w20: J1.17 J1.18 340,905 370.34,874.66 458.09,874.66 494.09,838.66 505.91,838.66 522.24,855 U3.2
NetP1_1: P1.1 P1.2 U2.8 | length 382.6
  Top Layer w20: 1005,650 1013.13,650 1184.49,478.64 1184.49,475.51 P1.1 P1.2
NetR1_1: R1.1 U1.2 U2.6 | length 277
  Top Layer w10: U1.2 923.38,555 945.16,576.77 ; U2.6 945.16,576.77 ; R1.1 964.72,596.34 945.16,576.77
NetR2_1: R2.1 U2.5 U3.7 | length 372.7
  Top Layer w10: U3.7 800.53,852.53 862.47,852.53 v1(865,850) ; v1(854.2,780.93) 890,745.13 890,672.28 902.76,659.52 924.54,659.52 U2.5@925.47,658.58 ; R2.1 910.91,596.34 925.47,610.91 U2.5
  Bottom Layer w10: v1(854.2,780.93) 854.2,837.14 865,847.94 v1(865,850)
NetR3_1: R3.1 U2.4 U3.6 | length 212.3
  Top Layer w10: U3.6 798.99,805.93 885.93,805.93 R3.1@910,830 ; R3.1 R3.1@910,830 ; U2.4 925.47,814.53 R3.1@910,830
PWR_GND: C2.1 C4.1 C6.1 C8.2 C10.2 C15.2 D2.1 P1.5 P1.6 R6.1 U1.4 U2.2 U2.3 U2.7 U2.9 U3.5 U5.1 U6.3 | length 242.1
  Top Layer w10: U2.9@932.33,683.57 958.79,683.57 964.84,677.52 U2.7 ; U2.3 945.16,714.84 U2.9 964.84,714.84 U2.2
  Top Layer w20: v1(1140,345) 1140.77,344.23 1159.43,344.23 D2.1
  other v1: 1080,240 985,290 1050,320 770,380 760,655 785,720 1060,730 955,805 1005,965 770,1035
pads on no net: U1.7

## Polygon pours and split planes (outlines as drawn)
+BAT_EXT on Top Layer (solid, pour order 97): 1009.85,745 1009.85,680.15 1175,515 1330,515 1345,530 1345,580 1330,595 1175,595 1040,730 1040,779.88 1035,785 1035,865 1025,875 990,875 980,865 980,745
+V_BAT_LDO on Top Layer (solid, pour order 91): 805,185 805,70 820,55 1115,55 1125,65 1125,185 1110,200 955,200 945,210 945,295 980,330 1030,330 1040,340 1040,375 1030,385 960.77,385 890,323.67 890,210 880,200 820,200
+BAT_EXT on Top Layer "GND" (solid, pour order 93): 985,445 1020,445 1060,485 1060,515 1080,535 1100,535 1120,515 1120,460 1055,395 985,395 975,405 975,435
+3V3_EXT on Top Layer "GND" (solid, pour order 89): 70,345 350,345 380,375 435,375 445,365 445,315 400,270 70,270 60,280 60,335
PWR_GND on Top Layer "GND" (solid, pour order 80): 970,260 970,220 1090,220 1100,230 1100,250 1090,260
GND on Top Layer "GND" (solid, pour order 79): 370,260 370,220 490,220 500,230 500,250 490,260
PWR_GND on Top Layer "GND" (solid, pour order 78): 980,965 980,905 1030,905 1030,965 1015,980 995,980
PWR_GND on Top Layer "GND" (solid, pour order 76): 740,660 750,670 840,670 840,640 750,640 740,650
GND on Top Layer "GND" (solid, pour order 77): 670,660 660,670 570,670 570,640 660,640 670,650
PWR_GND on Top Layer "GND" (solid, pour order 74): 745,950 745,1040 755,1050 785,1050 795,1040 795,950
GND on Top Layer "GND" (solid, pour order 72): 615,950 615,1040 625,1050 655,1050 665,1040 665,950
PWR_GND on Top Layer "GND" (solid, pour order 69): 745,460 745,375 757.28,362.72 782.72,362.72 795,375 795,460
GND on Top Layer "GND" (solid, pour order 67): 615,460 615,375 627.28,362.72 652.72,362.72 665,375 665,460
PWR_GND on Top Layer "GND" (solid, pour order 66): 840,770 755,770 755,725 775,705 800,705 840,745
GND on Top Layer "GND" (solid, pour order 65): 570,770 655,770 655,725 635,705 610,705 570,745
NetP1_1 on Top Layer "GND" (solid, pour order 64): 980,665 1010,665 1020,655 1020,635 980,635
+5V on Top Layer "Top Layer-+5V" (solid, pour order 42): 50,140 50,70 65,55 680,55 695,70 695,185 680,200 320,200 295,200 250,155 65,155
+3V3_BAT on Top Layer "Top Layer-+3V3_BAT" (solid, pour order 53): 780,490 810,460 810,400 960,400 970,410 970,450 980,460 1020,460 1030,470 1030,530 1020,540 865,540 845,520 780,520
+3V3 on Top Layer "Top Layer-+3V3" (solid, pour order 52): 605,470 630,495 630,520 565,520 565,502.07 552.93,490 545,490 500,535 385,535 375,525 375,405 385,395 605,395
+3V3_BAT on Top Layer "Top Layer-+3V3_BAT 1" (solid, pour order 49): 885,905 955,905 955,1040 945,1050 820,1050 810,1040 810,950 780,920 755,920 750,915 750,895 755,890 840,890 845,895 845,915 860,930 870,930 885,915
+3V3 on Top Layer "Top Layer-+3V3 1" (solid, pour order 44): 375,900 525,900 525,925 540,940 550,940 565,925 565,895 570,890 655,890 660,895 660,915 655,920 630,920 600,950 600,1010 590,1020 385,1020 375,1010
PWR_GND on Top Layer "PWR_GND_L01_P025" (solid, pour order 25): 940,730 970,730 970,820 965,825 945,825 940,820
+3V3_BAT on Bottom Layer "Bottom Layer-+3V3_BAT" (solid, pour order 22): 970,345 940,345 930,355 930,425 910,445 740,445 730,455 730,1060 740,1070 1135,1070 1145,1060 1145,455 1135,445 1000,445 980,425 980,355
+3V3 on Bottom Layer "Bottom Layer-+3V3" (solid, pour order 84): 670,445 495,445 480,430 480,355 470,345 440,345 430,355 430,430 415,445 285,445 275,455 275,1060 285,1070 670,1070 680,1060 680,455
+BAT_EXT on Bottom Layer "GND" (solid, pour order 5): 1064.67,499.51 1079.51,484.67 1100.49,484.67 1115.33,499.51 1115.33,510.33 1120,515 1330,515 1345,530 1345,580 1330,595 1115,595 1064.67,544.67
PWR_GND on Bottom Layer "GND" (solid, pour order 88): 915,310 995,310 1005,300 1005,280 995,270 915,270
GND on Bottom Layer "GND" (solid, pour order 95): 415,305 495,305 505,295 505,275 495,265 415,265
PWR_GND on Bottom Layer "GND" (solid, pour order 87): 975,260 975,220 1090,220 1100,230 1100,250 1090,260
PWR_GND on Bottom Layer "GND" (solid, pour order 7): 1080,739.99 1080,720 1069.1,709.1 1000,709.1 1000,751.02 1069.2,750.82
GND on Bottom Layer "GND" (solid, pour order 11): 330,739.99 330,720 340.9,709.1 410,709.1 410,751.02 340.8,750.82
PWR_GND on Bottom Layer "GND" (solid, pour order 86): 1030,435 1030,315 1040,305 1060,305 1070,315 1070,435
GND on Bottom Layer "GND" (solid, pour order 85): 525,435 525,320 535,310 555,310 565,320 565,435
+5V on Bottom Layer "+5V_L04_P083" (solid, pour order 83): 345,310 400,310 400,260 465,195 475,195 485,185 485,65 475,55 375,55 365,65 365,210 345,230
+V_BAT_LDO on Bottom Layer "+V_BAT_LDO_L04_P082" (solid, pour order 82): 845,310 845,215 905,155 905,70 920,55 1115,55 1125,65 1125,185 1110,200 955,200 905,250 905,305 900,310
+5V on Bottom Layer "+5V_L04_P056" (solid, pour order 56): 345,435 385,435 385,350 400,335 400,250 345,250
+V_BAT_LDO on Bottom Layer "+V_BAT_LDO_L04_P081" (solid, pour order 81): 845,435 885,435 885,350 900,335 900,250 845,250
PWR_GND on Upper Inner Layer "Upper Inner Layer-PWR_GND" (solid, pour order 58): 710,110 730,90 730,70 745,55 1330,55 1355,80 1355,1000 1285,1070 740,1070 730,1060 730,170 710,150
GND on Upper Inner Layer "GND_L02_P059" (solid, pour order 59): 680,1060 680,70 665,55 70,55 55,70 55,1060 65,1070 670,1070
PWR_GND on Lower Inner Layer "Upper Inner Layer-PWR_GND" (solid, pour order 34): 710,110 730,90 730,70 745,55 1330,55 1355,80 1355,1000 1285,1070 740,1070 730,1060 730,170 710,150
GND on Lower Inner Layer "GND_L03_P009" (solid, pour order 9): 680,1060 680,70 665,55 70,55 55,70 55,1060 65,1070 670,1070

## Silkscreen, mask and mechanical layers (free items; w line width, h text height)
Top Overlay:
  text "GND" at 255,990.53 h50
  text "LEMEC  / 2026" at 929.88,980 h50
  text "SCL" at 255,890.53 h50
  text "C. Katsionis" at 1120,800.53 h50
  text "GND" at 255,790.53 h50
  text "Fuel Gauge  / Module" at 968.35,705 h50
  text "SDA" at 255,690.53 h50
  text "V-" at 1103.47,640 h50
  text "GND" at 255,590.53 h50
  text "+3V3" at 450,585.46 h40
  text "V+" at 1098.41,540 h50
  text "ALCC" at 254.98,490.53 h50
  text "VS" at 1096.49,440.53 h50
  text "GND" at 255,390.53 h50
  text "+3V3_BAT" at 1155,362.1 h40
  text "JP_3V3" at 474.93,352.1 h40
  text "JP_BAT" at 814.93,352.1 h40
  text "+3V3" at 255,290.58 h50
  text "GND" at 255,190.53 h50
  text "+5" at 255,90.53 h50
Mechanical 1:
  lines w10: 0,30 ccw(c25,30) 25,5 1375,5 ccw(c1375,30) 1400,30 1400,1080 ccw(c1375,1080) 1375,1105 25,1105 ccw(c25,1080) 0,1080 0,30